# Allegro board PSU-C2-6Layers - Copy.brd
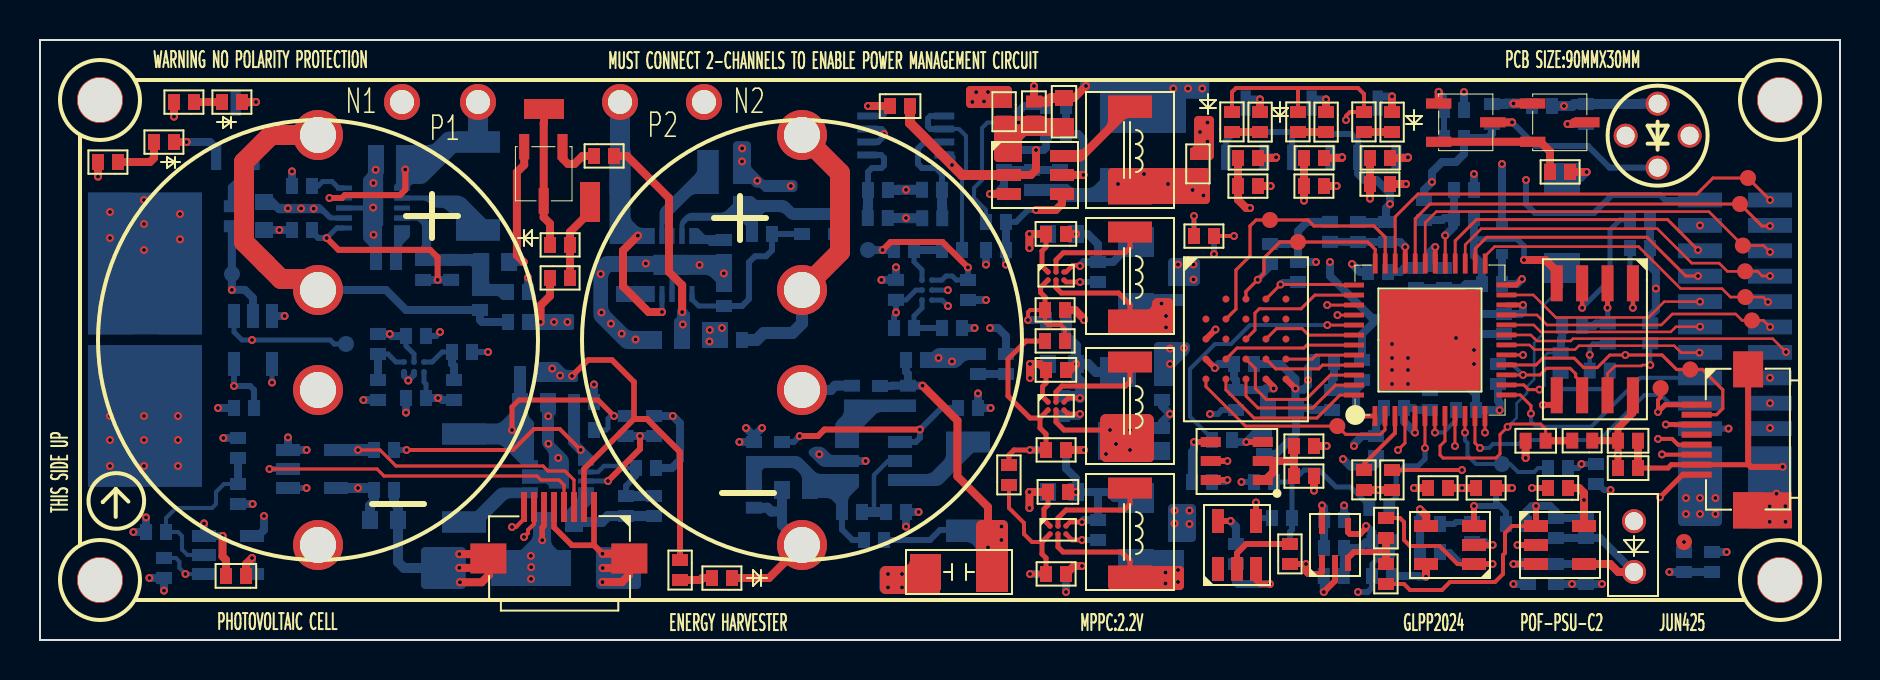
[diagram p0: board, top side]
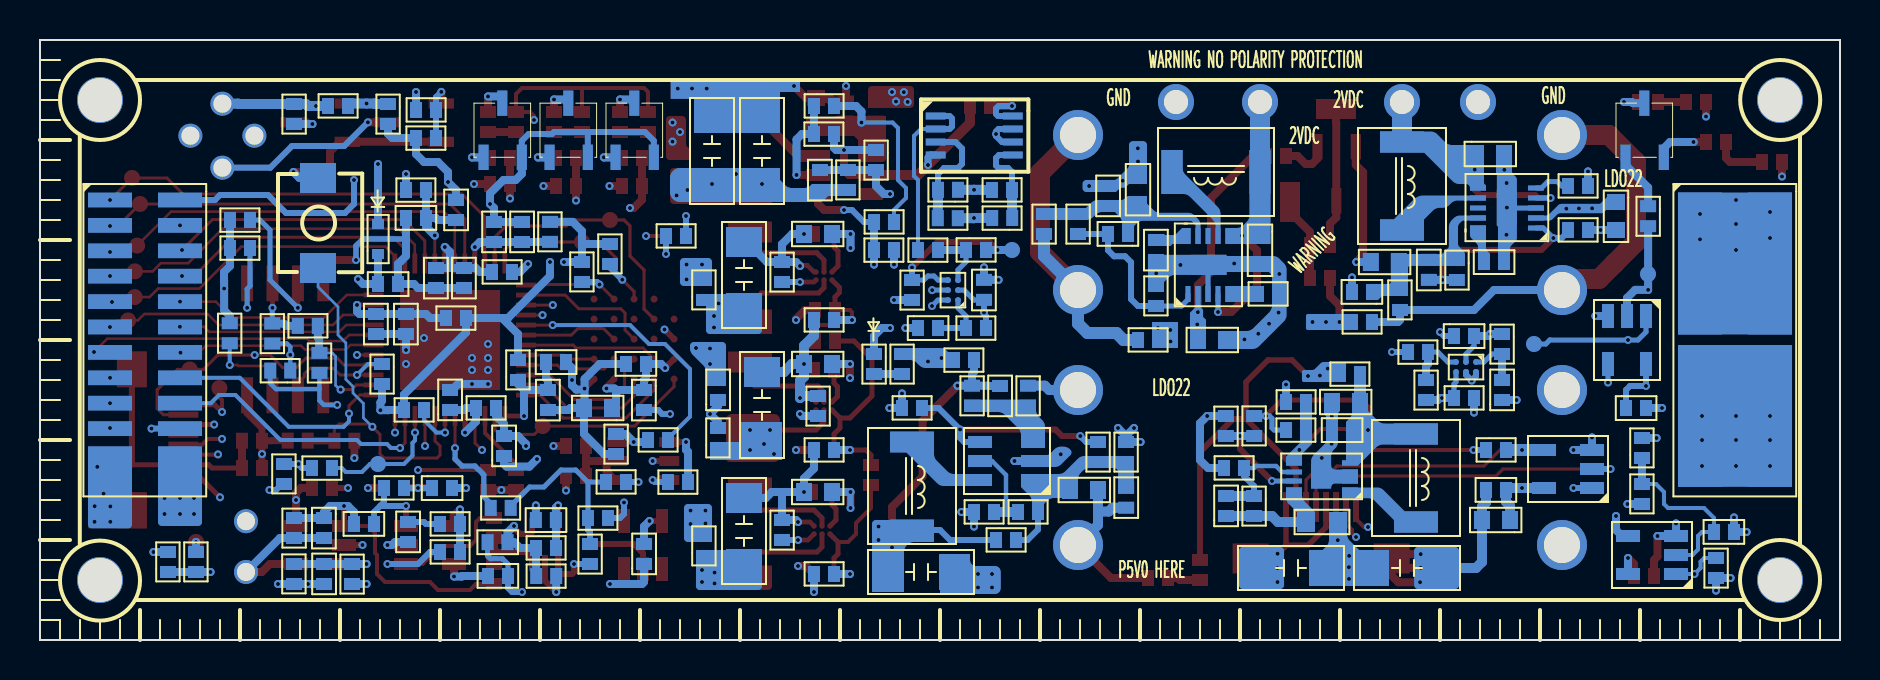
[diagram p1: board, bottom side, seen from below]

Outline 90 x 30 mm; copper layers: TOP, GND, SIG1, VCC, GND2, BOTTOM. Coordinates in mm from the lower left corner of the outline.
Outline path: 0,30 90,30 90,0 0,0 0,30

## Design rules (mm)
constraint set DEFAULT: min track width 0.127
net group N478267: nets N478267 N478271
net group N485107: nets N485107 N485115
net group N813852: nets N813852 N814000
net group N1495908: nets N1495908 N1495915
net group N1504028: nets N1504028 N1504040
net group N1511461: nets N1511461 N1511469
net group P1V8: nets N1128601 P1V8
net group SIG_ALIVE: nets N1346126 SIG_ALIVE
net group VCAP: nets N821854 N822032
net group VCAP1: nets N478345 VCAP1
net group VCAP2: nets N485373 VCAP2
net group 1ST_EN: nets 1ST_EN IO_P5V0_SHDN IO_P5V0_SHDN_EXT N813698 N813706 N813884 N813992
net group CHG_FULL: nets CHG_FULL N821870 N822044 N823149 N823315 N824564 N824724 N1633088 UV_SHDN
net group DPU_UART_TX: nets DPU_UART_TX N1120309 N1120313 N1120345 P2V9ADJ PSU_UART_TX
net group IAM_ALIVE_EXT: nets IAM_ALIVE IAM_ALIVE_EXT N1161020
net group MG1: nets RAM_ADQ7
net group N1493508: nets N1493508 N1504216 N1511693
net group N1528431: nets N1528431 N1528623 N1528651
net group P1V2: nets P1V2
net group P1V8ADJ_PRE: nets N1528387 N1528491 P1V8ADJ_PRE
net group P5033_PRE: nets N1521862 N1521910 N1521958 N1522062 N1522150 P5033_PRE

## Placement (name value [footprint] x y rotation side)
C1  0.1uF  [C0402_SMT]  42.5 26.7 0 top
C2  0.1uF  [C0402_SMT]  49.7 26.93 270 top
C3  10uF  [C0603_SMT]  51.2 25.7 90 top
C4  0.1uF  [C0402_SMT]  51.3 20.3 180 top
C5  CEN5R5205HF-ZG  [SUC_C_5D0_21D5_H_20D5]  13.9 15 270 top
C6  CEN5R5205HF-ZG  [SUC_C_5D0_21D5_H_20D5]  38.1 15 270 top
C7  0.1uF  [C0402_SMT]  51.3 13.5 180 top
C8  0.47uF  [C0402_SMT]  74.28 9.96 0 top
C9  10nF  [C0402_SMT]  78.9 9.96 0 top
C10  0.1uF  [C0402_SMT]  78.9 8.6 0 top
C11  0.1uF  [C0402_SMT]  76.4 7.6 180 top
C12  0.1uF  [C0402_SMT]  51.4 7.4 180 top
C13  0.1uF  [C0402_SMT]  67.3 6.1 270 top
C14  47uF  [C1206]  47.6 3.4 180 top
C15  0.1uF  [C0402_SMT]  10.3 3.2 180 top
C16  47uF  [C1206]  56.4 22.8 90 bottom
C17  47uF  [C1206]  53.9 22.8 90 bottom
C18  10uF  [C0603_SMT]  18.2 24.3 180 bottom
C19  22pF  [C0402_SMT]  51 23.5 270 bottom
C20  10uF  [C0603_SMT]  35.1 21.8 90 bottom
C21  0.1uF  [C0402_SMT]  36.6 21.7 90 bottom
C22  0.1uF  [C0402_SMT]  69.2 21 90 bottom
C23  10uF  [C0603_SMT]  11.2 21.9 270 bottom
C24  10nF  [C0402_SMT]  70.7 21.1 0 bottom
C25  0.1uF  [C0402_SMT]  67.3 19.9 90 bottom
C26  10nF  [C0402_SMT]  65.9 19.9 90 bottom
C27  10uF  [C0603_SMT]  50.4 20.3 0 bottom
C28  22pF  [C0402_SMT]  35.6 20.3 0 bottom
C29  1uF  [C0402_SMT]  34.2 20 270 bottom
C30  10uF  [C0603_SMT]  29 20.2 270 bottom
C31  10uF  [C0603_SMT]  22.05 18.9 0 bottom
C32  1uF  [C0402_SMT]  17.8 18.9 180 bottom
C33  22pF  [C0402_SMT]  20.55 19.01 270 bottom
C34  22uF  [C1206]  54.8 16.6 90 bottom
C35  0.1uF  [C0402_SMT]  70.2 18.6 270 bottom
C36  10nF  [C0402_SMT]  68.8 18.6 270 bottom
C37  0.1uF  [C0402_SMT]  73.1 17.8 180 bottom
C38  0.1uF  [C0402_SMT]  42.8 18.01 270 bottom
C39  0.1uF  [C0402_SMT]  23.4 17.4 0 bottom
C40  10nF  [C0402_SMT]  73.2 16.3 270 bottom
C41  0.1uF  [C0402_SMT]  71.7 16.3 270 bottom
C42  2.2uF  [C0402_SMT]  46.1 15.6 180 bottom
C43  0.1uF  [C0402_SMT]  19.3 15.2 180 bottom
C44  10uF  [C0603_SMT]  32.1 15 180 bottom
C45  10nF  [C0402_SMT]  64.7 13.9 180 bottom
C46  0.1uF  [C0402_SMT]  59.7 13.8 0 bottom
C47  10uF  [C0603_SMT]  50.4 13.8 0 bottom
C48  2.2uF  [C0402_SMT]  16.9 12 90 bottom
C49  22pF  [C0402_SMT]  42 11.7 90 bottom
C50  0.1uF  [C0402_SMT]  69.5 11.5 90 bottom
C51  0.1uF  [C0402_SMT]  64.6 12.5 270 bottom
C52  10uF  [C0603_SMT]  24 11.9 0 bottom
C53  22uF  [C1206]  53.9 10.1 90 bottom
C54  10uF  [C0603_SMT]  61.4 11.6 0 bottom
C55  0.1uF  [C0402_SMT]  10.7 11.6 180 bottom
C56  0.1uF  [C0402_SMT]  25.4 10.5 180 bottom
C57  0.1uF  [C0402_SMT]  70.4 7.6 180 bottom
C58  10uF  [C0603_SMT]  38.5 7.5 180 bottom
C59  0.1uF  [C0402_SMT]  16.7 7.5 0 bottom
C60  10uF  [C0603_SMT]  50.4 7.4 0 bottom
C61  0.1uF  [C0402_SMT]  35.7 6.61 90 bottom
C62  33pF  [C0402_SMT]  30.7 6.2 90 bottom
C63  0.1uF  [C0402_SMT]  65.2 6 180 bottom
C64  10uF  [C0603_SMT]  16.5 6 0 bottom
C65  0.1uF  [C0402_SMT]  73.3 5.8 0 bottom
C66  1.5pF  [C0402_SMT]  75.8 6.1 270 bottom
C67  22uF  [C1206]  54.8 3.8 90 bottom
C68  0.1uF  [C0402_SMT]  71.6 4.9 90 bottom
C69  0.1uF  [C0402_SMT]  5.3 5.4 0 bottom
C70  0.1uF  [C0402_SMT]  67.62 4.89 180 bottom
C71  0.1uF  [C0402_SMT]  59.8 3.8 90 bottom
C72  22uF  [C1206]  25.8 3.6 0 bottom
C73  22uF  [C1206]  23.3 3.6 180 bottom
C74  47uF  [C1206]  47.6 3.4 180 bottom
C75  DNP  [C0402_SMT]  75.8 2.8 90 bottom
C76  0.1uF  [C0402_SMT]  66.6 3.2 0 bottom
D1  GREEN LED  [LED0402_SMT]  10.1 26.9 180 top
D2  GREEN LED  [LED0402_SMT]  59.6 25.4 90 top
D3  GREEN LED  [LED0402_SMT]  62.9 25.4 90 top
D4  GREEN LED  [LED0402_SMT]  66.2 25.4 90 top
D5  GREEN LED  [LED0402_SMT]  6.7 24.9 180 top
D6  GREEN LED  [LED0402_SMT]  34.6 3.1 180 top
D7  1N5819WT  [SOD-523]  73.1 19.3 90 bottom
D8  GREEN LED  [LED0402_SMT]  48.3 14.3 270 bottom
D9  GREEN LED  [LED0402_SMT]  25.5 19.75 0 top
FB1  BLM15PX121SN1D  [L0402_SMT]  64.5 19.91 90 bottom
FB2  BLM15PX121SN1D  [L0402_SMT]  67.4 18.4 180 bottom
FB3  BLM15PX121SN1D  [L0402_SMT]  68.7 16.1 0 bottom
FB4  BLM15PX121SN1D  [L0402_SMT]  66.1 13 90 bottom
FB5  BLM15PX121SN1D  [L0402_SMT]  68.2 11.6 180 bottom
J1  CONN-1X8  [FPC-0D5-8P]  82.83 11.77 270 top
J2  CONN-24P  [SMD_CONN_2X12P_1D27]  83 22 270 bottom
J3  CONN-24P  [SMD_CONN_2X12P_1D27]  3.5 22 270 bottom
J4  CONN-1X8  [FPC-0D5-8P]  27.7 6.65 180 top
L1  47uH/200mA  [IND_SMD_4D4X4D2]  54.5 26.7 270 top
L2  2.2uH/200mA  [IND_SMD_4D4X4D2]  54.5 20.4 270 top
L3  2.2uH/200mA  [IND_SMD_4D4X4D2]  54.5 13.9 270 top
L4  2.2uH/200mA  [IND_SMD_4D4X4D2]  54.5 7.6 270 top
L5  10uH/1A  [IND_SMD_4D4X4D2]  29 23.4 0 bottom
L6  10uH/1A  [IND_SMD_4D4X4D2]  21.9 24.9 270 bottom
L7  2.2uH  [L0402]  56.1 12 90 bottom
L8  2.2uH  [L0402]  59.8 12.5 270 bottom
L9  2.2uH  [L0402]  66.8 9.2 90 bottom
L10  4.7uH/200mA  [IND_SMD_4D4X4D2]  21.2 10.3 270 bottom
L11  47uH/100mA  [IND_SMD_4D4X4D2]  46.4 9.9 270 bottom
L12  0R  [L0603]  26.7 5.9 180 bottom
LD1  LaserDiode  [LD_CIR_THR_4P]  80.88 25.22 90 top
NOREF  -  []  0 0 90 top
NOREF#2  -  [unnamed#2]  3 27 0 top
NOREF#3  -  [unnamed#2]  87 27 0 top
NOREF#4  -  [unnamed#2]  87 3 0 top
NOREF#5  -  []  0 30 0 top
NOREF#6  -  [unnamed#2]  3 3 0 top
PD1  Photodiode  [PD-THR-2P]  79.7 3.4 90 top
Q1  BFR93AWH6327  [SOT23-3]  69.5 27.3 270 top
Q2  BFR93AWH6327  [SOT23-3]  74.2 27.3 270 top
Q3  MMBT2222ALT1G  [SOT-23-3]  68.3 23.7 180 bottom
Q4  MMBT2222ALT1G  [SOT-23-3]  65 23.7 180 bottom
Q5  MMBT2222ALT1G  [SOT-23-3]  61.7 23.7 180 bottom
Q6  MMBT2222ALT1G  [SOT-23-3]  11.2 23.7 180 bottom
Q7  MMBT2222ALT1G  [SOT-23-3]  26.6 25.1 180 top
R1  20K  [R0402_SMT]  7.7 26.9 180 top
R2  0  [R0402_SMT]  48.2 26.92 270 top
R3  20K  [R0402_SMT]  61 26.4 270 top
R4  20K  [R0402_SMT]  64.3 26.4 270 top
R5  20K  [R0402_SMT]  67.6 26.4 270 top
R6  1K  [R0402_SMT]  59.9 24.1 0 top
R7  1K  [R0402_SMT]  63.2 24.1 0 top
R8  1K  [R0402_SMT]  66.5 24.1 0 top
R9  20K  [R0402_SMT]  3.9 23.9 180 top
R10  0  [R0402_SMT]  57.9 23.3 90 top
R11  51  [R0402_SMT]  75.5 23.4 0 top
R12  6.8K  [R0402_SMT]  67.5 22.8 180 top
R13  6.8K  [R0402_SMT]  60.9 22.7 180 top
R14  6.8K  [R0402_SMT]  64.2 22.7 180 top
R15  DNP  [R0402_SMT]  58.7 20.2 180 top
R16  DNI  [R0402_SMT]  32 4 270 top
R17  0  [R0402_SMT]  50.25 16.5 0 top
R18  10K  [R0402_SMT]  77.61 9.97 180 top
R19  DNP  [R0402_SMT]  63.7 9.7 180 top
R20  DNP  [R0402_SMT]  50.3 9.5 0 top
R21  0  [R0402_SMT]  63.7 8.2 180 top
R22  0  [R0402_SMT]  66.2 7.5 90 top
R23  DNP  [R0402_SMT]  67.6 7.5 90 top
R24  DNP  [R0402_SMT]  69.4 7.6 0 top
R25  DNP  [R0402_SMT]  71.8 7.6 0 top
R26  0  [R0402_SMT]  62.5 3.8 90 top
R27  DNP  [R0402_SMT]  50.3 3.3 0 top
R28  DNP  [R0402_SMT]  67.3 2.8 90 top
R29  510  [R0402_SMT]  75.6 26.7 180 bottom
R30  DNI  [R0402_SMT]  51.3 26.7 180 bottom
R31  510  [R0402_SMT]  71.2 26.5 180 bottom
R32  51  [R0402_SMT]  77.3 26.8 270 bottom
R33  510  [R0402_SMT]  72.6 26.8 270 bottom
R34  0  [R0402_SMT]  50.3 25.3 0 bottom
R35  510  [R0402_SMT]  70.2 25.1 0 bottom
R36  39K  [R0402_SMT]  48.2 24.5 270 bottom
R37  150K  [R0402_SMT]  49.6 22.5 90 bottom
R38  200K  [R0402_SMT]  13.6 22.7 180 bottom
R39  1M  [R0402_SMT]  44.1 22.51 0 bottom
R40  1M  [R0402_SMT]  42.4 22.5 180 bottom
R41  100R  [R0402_SMT]  70.7 22.5 0 bottom
R42  1K  [R0402_SMT]  9.6 21.69 270 bottom
R43  1M  [R0402_SMT]  45.11 21.09 180 bottom
R44  2M  [R0402_SMT]  41.39 21.1 0 bottom
R45  10K  [R0402_SMT]  79.5 21 0 bottom
R46  DNI  [R0402_SMT]  48.3 20.9 180 bottom
R47  0  [R0402_SMT]  39.8 21.3 270 bottom
R48  1M  [R0402_SMT]  38.1 21.3 270 bottom
R49  270K  [R0402_SMT]  13.6 20.5 180 bottom
R50  510  [R0402_SMT]  58.7 20.2 180 bottom
R51  10K  [R0402_SMT]  79.5 19.6 0 bottom
R52  5.1K  [R0402_SMT]  43.7 19.5 180 bottom
R53  100K  [R0402_SMT]  47.3 19.5 0 bottom
R54  1K  [R0402_SMT]  45.1 19.5 0 bottom
R55  4.7K  [R0402_SMT]  61.5 18.8 90 bottom
R56  1M  [R0402_SMT]  19.16 19 270 bottom
R57  4.7K  [R0402_SMT]  62.9 17.9 90 bottom
R58  40.2K  [R0402_SMT]  52.9 18.9 270 bottom
R59  0  [R0402_SMT]  56.8 17 90 bottom
R60  20K  [R0402_SMT]  46.4 18 270 bottom
R61  200K  [R0402_SMT]  29.1 17.3 180 bottom
R62  270K  [R0402_SMT]  34.2 16.7 90 bottom
R63  0  [R0402_SMT]  22 16.5 90 bottom
R64  DNP  [R0402_SMT]  51.3 16 180 bottom
R65  0  [R0402_SMT]  24.4 15.9 180 bottom
R66  DNI  [R0402_SMT]  77.11 15.71 180 bottom
R67  3.3K  [R0402_SMT]  42.7 15.6 0 bottom
R68  10K  [R0402_SMT]  80.51 14.84 90 bottom
R69  0  [R0402_SMT]  78.39 15.82 270 bottom
R70  0  [R0402_SMT]  35.1 15 180 bottom
R71  3.3K  [R0402_SMT]  16.9 15.3 270 bottom
R72  160  [R0402_SMT]  20.6 14.4 0 bottom
R73  0  [R0402_SMT]  43.3 14 0 bottom
R74  0  [R0402_SMT]  76.03 14.36 270 bottom
R75  12K  [R0402_SMT]  46.9 14.3 270 bottom
R76  DNI  [R0402_SMT]  77.49 13.47 0 bottom
R77  10K  [R0402_SMT]  72.9 13.8 270 bottom
R78  0  [R0402_SMT]  24 13.3 0 bottom
R79  300  [R0402_SMT]  20.7 13 270 bottom
R80  150K  [R0402_SMT]  43.4 12.71 270 bottom
R81  33.2K  [R0402_SMT]  40.6 12.71 270 bottom
R82  10K  [R0402_SMT]  19.3 12.1 180 bottom
R83  100K  [R0402_SMT]  27.7 11.9 180 bottom
R84  20K  [R0402_SMT]  51.1 12.2 270 bottom
R85  DNP  [R0402_SMT]  46.9 11.6 180 bottom
R86  2.2K  [R0402_SMT]  71.8 11.5 180 bottom
R87  DNI  [R0402_SMT]  29.29 10.2 90 bottom
R88  0  [R0402_SMT]  30.7 11.2 270 bottom
R89  DNI  [R0402_SMT]  26.7 10.5 0 bottom
R90  0  [R0402_SMT]  56.1 9.6 90 bottom
R91  0  [R0402_SMT]  59.6 10 180 bottom
R92  10K  [R0402_SMT]  61.2 10.3 270 bottom
R93  10K  [R0402_SMT]  9.9 9.1 90 bottom
R94  DNP  [R0402_SMT]  51.3 9.5 180 bottom
R95  2K  [R0402_SMT]  17.7 9.5 180 bottom
R96  0  [R0402_SMT]  37.1 9.9 270 bottom
R97  0  [R0402_SMT]  35.7 9.9 270 bottom
R98  309K  [R0402_SMT]  30.8 8.6 180 bottom
R99  0  [R0402_SMT]  75.4 8.6 0 bottom
R100  DNP  [R0402_SMT]  77.8 7.8 90 bottom
R101  DNP  [R0402_SMT]  61.7 7.9 180 bottom
R102  1K  [R0402_SMT]  57.6 7.9 0 bottom
R103  100K  [R0402_SMT]  72.8 7.6 180 bottom
R104  6.8K  [R0402_SMT]  9.9 6.8 90 bottom
R105  1M  [R0402_SMT]  29.3 7.2 270 bottom
R106  0  [R0402_SMT]  66.46 6.61 0 bottom
R107  0  [R0402_SMT]  43.3 6.4 180 bottom
R108  DNI  [R0402_SMT]  41.1 6.4 180 bottom
R109  0  [R0402_SMT]  61.6 6.1 0 bottom
R110  10K  [R0402_SMT]  70 5.8 180 bottom
R111  10K  [R0402_SMT]  77.3 6.1 270 bottom
R112  11.8K  [R0402_SMT]  52.9 6 270 bottom
R113  DNP  [R0402_SMT]  42.2 5 180 bottom
R114  0  [R0402_SMT]  56.8 4.2 90 bottom
R115  DNP  [R0402_SMT]  65.2 4.6 180 bottom
R116  10K  [R0402_SMT]  70 4.4 180 bottom
R117  DNP  [R0402_SMT]  62.5 4.8 270 bottom
R118  DNP  [R0402_SMT]  83.6 3.4 90 bottom
R119  0  [R0402_SMT]  82.2 3.4 90 bottom
R120  100K  [R0402_SMT]  6.2 4.1 270 bottom
R121  0  [R0402_SMT]  77.3 2.8 90 bottom
R122  DNP  [R0402_SMT]  51.3 3.3 180 bottom
R123  DNP  [R0402_SMT]  74.4 3.8 270 bottom
R124  DNP  [R0402_SMT]  64.19 3.2 0 bottom
R125  0  [R0402_SMT]  48.45 7.75 90 top
R126  0  [R0402_SMT]  50.25 14.95 0 top
R127  20K  [R0402_SMT]  25.5 18.1 0 top
R128  1K  [R0402_SMT]  27.7 24.2 0 top
SW1  SW KEY-SPST  [SW_SMD_2P_L3D9_W3D0_P4D5]  76.1 18.6 90 bottom
TP1  T POINT R  [TP_SMD_CIR_0D8_NP]  61.5 21 0 top
TP2  T POINT R  [TP_SMD_CIR_0D8_NP]  62.9 19.9 0 top
TP3  T POINT R  [TP_SMD_CIR_0D8_NP]  85.14 19.72 0 top
TP4  T POINT R  [TP_SMD_CIR_0D8_NP]  85.26 18.43 0 top
TP5  T POINT R  [TP_SMD_CIR_0D8_NP]  85.27 17.15 0 top
TP6  T POINT R  [TP_SMD_CIR_0D8_NP]  85.59 15.98 0 top
TP7  T POINT R  [TP_SMD_CIR_0D8_NP]  82.51 13.53 0 top
TP8  T POINT R  [TP_SMD_CIR_0D8_NP]  81.03 12.6 0 top
TP9  T POINT R  [TP_SMD_CIR_0D8_NP]  64.87 10.7 0 top
TP10  T POINT R  [TP_SMD_CIR_0D8_NP]  82.2 4.9 0 top
TP11  Solar Cell V-  [TP_THR_1D8_1D2]  33.2 26.9 180 bottom
TP12  Solar Cell V+  [TP_THR_1D8_1D2]  29 26.9 180 bottom
TP13  Solar Cell V+  [TP_THR_1D8_1D2]  21.9 26.9 180 bottom
TP14  Solar Cell V-  [TP_THR_1D8_1D2]  18.1 26.9 180 bottom
TP15  T POINT R  [TP_SMD_CIR_0D8_NP]  41.4 19.5 180 bottom
TP16  T POINT R  [TP_SMD_CIR_0D8_NP]  15.3 14.8 180 bottom
TP17  T POINT R  [TP_SMD_CIR_0D8_NP]  73.1 8.8 180 bottom
TP18  T POINT R  [TP_SMD_CIR_0D8_NP]  85.4 23.1 0 top
TP19  T POINT R  [TP_SMD_CIR_0D8_NP]  85 21.8 0 top
TP20  T POINT R  [TP_SMD_CIR_0D8_NP]  9.6 18.3 180 bottom
TP21  T POINT R  [TP_SMD_REC_1D0X2D0]  27.5 21.9 0 top
TP22  T POINT R  [TP_SMD_REC_1D0X2D0]  25.2 26.55 90 top
U1  LTC3542ES6  [TSOT-23-6]  51.1 24.2 270 top
U2  MAX38650AANT+  [WLP-6]  50.4 18.4 0 top
U3  APS25608N-OBR-BD  [BGA-24]  58.3 17.05 0 top
U4  iCE40UP5K- SG48  [QFN-48]  69.5 15 90 top
U5  W25Q64JWSSIQ  [SOIC-8]  79.65 17.84 270 top
U6  MAX38650AANT+  [WLP-6]  50.4 11.9 0 top
U7  TPS22995HQDDCRQ1  [SOT-23-6]  61.14 8 180 top
U8  MAX38650AANT+  [WLP-6]  50.5 5.7 0 top
U9  SN74LVC1G14DBVR  [SOT-23-5]  58.9 3.55 90 top
U10  LMV7291MGX/NOPB  [SC70-5]  64.1 5.7 0 top
U11  OPA320AIDBVR  [SOT-23-5]  71.7 3.8 180 top
U12  OPA320AIDBVR  [SOT-23-5]  74.8 5.7 0 top
U13  ADA4051-2ARMZ  [MSOP-8]  41.6 26.2 270 bottom
U14  LTC3105EDD#PBF  [DFN-10]  18.1 20.6 90 bottom
U15  LTC3105EDD#PBF  [DFN-10]  32.6 20.2 180 bottom
U16  ADCMP380-1ACBZ-RL7  [WLCSP-6]  44.1 16.99 0 bottom
U17  SN74LVC1G32DBVR  [SOT-23-5]  9.7 16.2 270 bottom
U18  ADCMP380-1ACBZ-RL7  [WLCSP-6]  18.2 13.9 270 bottom
U19  LTC3542ES6  [TSOT-23-6]  43 8 90 bottom
U20  SN74AUP1G08DBVR  [SOT-23-5]  12.4 7.6 0 bottom
U21  LTC3539EDCB-2#TRPBF  [DFN-8]  27.3 7.5 90 bottom
U22  SN74LVC1G32DBVR  [SOT-23-5]  8.2 3.3 0 bottom

## Library data of the parts
C1 C38 C43 = CAP NP: signal model: DEFAULT_CAPACITOR_100000pF_2_1
C2 C4 C7-C13 C15 C21 C22 C24-C26 C28 C33 C35-C37 C39-C41 C45 C46 C50 C51 C54-C57 C59 C61 C63 C65 C66 C68-C71 C75 C76 = CAP NP
C3 C18 C20 C23 C27 C30 C31 C44 C47 C52 C58 C60 C64 = CAP NP: signal model: DEFAULT_CAPACITOR_1e+07pF_2_1
C5 C6 = SuperCapacitor
C14 C16 C17 C34 C53 C67 C72-C74 = CAP NP: signal model: DEFAULT_CAPACITOR_2.2e+07pF_2_1
C19 C49 C62 = CAP NP: signal model: DEFAULT_CAPACITOR_33.000000pF_2_1
C29 C32 = CAP NP: signal model: DEFAULT_CAPACITOR_1e+06pF_2_1
C42 C48 = CAP NP: signal model: DEFAULT_CAPACITOR_2.2e+06pF_2_1
D1-D6 D8 D9 = LED
D7 = DIODE
FB1-FB5 = INDUCTOR
J1 J4 = CONN-1X8
J2 J3 = CONN-24P
L1-L4 L7-L12 = INDUCTOR: signal model: DEFAULT_INDUCTOR_4700nH_2_1
L5 L6 = INDUCTOR: signal model: DEFAULT_INDUCTOR_10000nH_2_1
LD1 = LaserDiode_0
PD1 = Photodiode
Q1 Q2 = 2SC1815
Q3-Q7 = MMBT2222AL
R1-R10 R12-R14 R16 R18 R19 R21-R26 R28 R41 R45 R47 R51 R55 R57 R59 R63 R65 R66 R68-R70 R73-R78 R86 R90-R92 R97 R101-R103 R106 R109-R111 R114-R117 R121 R123 R124 R127 = R
R11 R32 = R: signal model: DEFAULT_RESISTOR_40.000000OHM_2_1
R15 R29 R31 R33 R35 R50 = R: signal model: DEFAULT_RESISTOR_510.000000OHM_2_1
R17 R20 R27 R30 R34 R42 R46 R53 R58 R60 R64 R82-R85 R87-R89 R93-R96 R99 R100 R104 R107 R108 R112 R113 R118-R120 R122 R125 R126 R128 = R: signal model: DEFAULT_RESISTOR_10000OHM_2_1
R36 R81 R98 = R: signal model: DEFAULT_RESISTOR_562000OHM_2_1
R37 R39 R40 R43 R44 R49 R62 R80 R105 = R: signal model: DEFAULT_RESISTOR_0.001OHM_2_1
R38 R61 = R: signal model: DEFAULT_RESISTOR_200000OHM_2_1
R48 R56 = R: signal model: DEFAULT_RESISTOR_0.00226OHM_2_1
R52 R79 = R: signal model: DEFAULT_RESISTOR_147000OHM_2_1
R54 R72 = R: signal model: DEFAULT_RESISTOR_36000OHM_2_1
R67 R71 = R: signal model: DEFAULT_RESISTOR_3300OHM_2_1
SW1 = SW KEY-SPST
TP1-TP10 TP15-TP22 = T POINT R
TP11-TP14 = T POINT A
U1 U19 = LTC3542ES6
U2 U6 U8 = MAX38650AANT+
U3 = APS25608N-OBR-BD_2
U4 = iCE40UP5K- SG48
U5 = W25Q64JW
U7 = TPS22995H-Q1
U9 = SN74LVC1G14DBVR
U10 = LMV7291MGX/NOPB
U11 U12 = OPA320AIDBVR
U13 = ADA4051-2ARMZ
U14 U15 = LTC3105EDD#PBF
U16 U18 = ADCMP380-1ACBZ-RL7
U17 U22 = SN74LVC1G32DBVR
U20 = SN74AUP1G08
U21 = LTC3539EDCB#PBF

## Footprints (pads in the part's own frame, mm; a bottom-side part is the same pattern mirrored in y, then rotated)
BGA-24
  round 0.35 smd: A2(1,0) A3(2,0) A4(3,0) A5(4,0) B1(0,-1) B2(1,-1) B3(2,-1) B4(3,-1) B5(4,-1) C1(0,-2) C2(1,-2) C3(2,-2) C4(3,-2) C5(4,-2) D1(0,-3) D2(1,-3) D3(2,-3) D4(3,-3) D5(4,-3) E1(0,-4) E2(1,-4) E3(2,-4) E4(3,-4) E5(4,-4)
C0402_SMT
  rect 0.6x0.8 smd: 1(0,0) 2(1,0)
C0603_SMT
  rect 0.8x0.9 smd: 1(0,0) 2(1.4,0)
C1206
  rect 1.5x1.8 smd: 1(0,0) 2(3.3,0)
DFN-8
  rect 0.25x0.8 smd: 1(0,-2.8) 2(0.45,-2.8) 3(0.9,-2.8) 4(1.35,-2.8) 5(1.35,0) 6(0.9,0) 7(0.45,0) 8(0,0)
  rect 1.2x1 smd: 9(0.676,-1.355)
DFN-10
  rect 0.25x0.8 smd: 1(0,-2.9) 2(0.5,-2.9) 3(1,-2.9) 4(1.5,-2.9) 5(2,-2.9) 6(2,0) 7(1.5,0) 8(1,0) 9(0.5,0) 10(0,0)
  rect 1.8x1 smd: 11(1.022,-1.444)
FPC-0D5-8P
  rect 0.3x1.5 smd: 1(0,0) 2(0.5,0) 3(1,0) 4(1.5,0) 5(2,0) 6(2.5,0) 7(3,0) 8(3.5,0)
  rect 1.8x1.5 smd: 9(-1.767,2.573) 10(5.283,2.573)
IND_SMD_4D4X4D2
  rect 1.05x2.2 smd: 1(0,0) 2(4.4,0)
L0402
  rect 0.6x0.8 smd: 1(0,0) 2(1,0)
L0402_SMT
  rect 0.6x0.8 smd: 1(0,0) 2(1,0)
L0603
  rect 0.9x1 smd: 1(0,0) 2(1.6,0)
LD_CIR_THR_4P
  round 1.2 hole 0.9: 1(1.6,0) 2(-1.6,0) 3(0,1.6) 4(0,-1.6)
LED0402_SMT
  rect 0.6x0.8 smd: 1(0,0) 2(1,0)
MSOP-8
  rect 0.35x1 smd: 1(-0.001,-3.615) 2(0.649,-3.615) 3(1.299,-3.615) 4(1.949,-3.615) 5(1.949,0.241) 6(1.299,0.241) 7(0.649,0.241) 8(-0.001,0.241)
PD-THR-2P
  round 1.2 hole 0.9: 1(0,0) 2(2.54,0)
QFN-48
  rect 1x0.24 smd: 1(-3.801,2.748) 2(-3.801,2.248) 3(-3.801,1.748) 4(-3.801,1.248) 5(-3.801,0.748) 6(-3.801,0.248) 7(-3.801,-0.252) 8(-3.801,-0.752) 9(-3.801,-1.252) 10(-3.801,-1.752) 11(-3.801,-2.252) 12(-3.801,-2.752) 25(3.822,-2.764) 26(3.822,-2.264) 27(3.822,-1.764) 28(3.822,-1.264) 29(3.822,-0.764) 30(3.822,-0.264) 31(3.822,0.236) 32(3.822,0.736) 33(3.822,1.236) 34(3.822,1.736) 35(3.822,2.236) 36(3.822,2.736)
  rect 0.24x1 smd: 13(-2.748,-3.826) 14(-2.248,-3.826) 15(-1.748,-3.826) 16(-1.248,-3.826) 17(-0.748,-3.826) 18(-0.248,-3.826) 19(0.252,-3.826) 20(0.752,-3.826) 21(1.252,-3.826) 22(1.752,-3.826) 23(2.252,-3.826) 24(2.752,-3.826) 37(2.746,3.797) 38(2.246,3.797) 39(1.746,3.797) 40(1.246,3.797) 41(0.746,3.797) 42(0.246,3.797) 43(-0.254,3.797) 44(-0.754,3.797) 45(-1.254,3.797) 46(-1.754,3.797) 47(-2.254,3.797) 48(-2.754,3.797)
  rect 5x5 smd: 49(0,0)
R0402_SMT
  rect 0.6x0.8 smd: 1(0,0) 2(1,0)
SC70-5
  rect 0.3x0.8 smd: 1(0,-1.85) 2(0.65,-1.85) 3(1.3,-1.85) 4(1.3,0) 5(0,0)
SMD_CONN_2X12P_1D27
  rect 0.74x2.2 smd: 1(0,-3.5) 2(1.27,-3.5) 3(2.54,-3.5) 4(3.81,-3.5) 5(5.08,-3.5) 6(6.35,-3.5) 7(7.62,-3.5) 8(8.89,-3.5) 9(10.16,-3.5) 10(11.43,-3.5) 11(12.7,-3.5) 12(13.97,-3.5) 13(13.97,0) 14(12.7,0) 15(11.43,0) 16(10.16,0) 17(8.89,0) 18(7.62,0) 19(6.35,0) 20(5.08,0) 21(3.81,0) 22(2.54,0) 23(1.27,0) 24(0,0)
SOD-523
  rect 0.5x0.6 smd: 1(0,0) 2(1.5,0)
SOIC-8
  rect 1.8x0.6 smd: 1(0,0) 2(0,-1.27) 3(0,-2.54) 4(0,-3.81) 5(5.6,-3.81) 6(5.6,-2.54) 7(5.6,-1.27) 8(5.6,0)
SOT23-3
  rect 0.51x1.27 smd: 1(0.476,0.434) 2(2.391,0.434) 3(1.415,3.142)
SOT-23-3
  rect 0.51x1.27 smd: 1(0.476,0.434) 2(2.391,0.434) 3(1.415,3.142)
SOT-23-5
  rect 1.2x0.6 smd: 1(0,0) 2(0,-0.95) 3(0,-1.9) 4(2.4,-1.9) 5(2.4,0)
SOT-23-6
  rect 1x0.5 smd: 1(0,0) 2(0,-0.95) 3(0,-1.9) 4(2.6,-1.9) 5(2.6,-0.95) 6(2.6,0)
SUC_C_5D0_21D5_H_20D5
  round 2.5 hole 1.8: 1(-2.5,0) 2(2.5,0) 3(-10.25,0) 4(10.25,0)
SW_SMD_2P_L3D9_W3D0_P4D5
  rect 1.5x1.8 smd: 1(0,0) 2(4.5,0)
TP_SMD_CIR_0D8_NP
  round 0.8 smd: 1(0,0)
TP_SMD_REC_1D0X2D0
  rect 1x2 smd: 1(0,0)
TP_THR_1D8_1D2
  round 1.8 hole 1.2: 1(0,0)
TSOT-23-6
  rect 0.6x1.2 smd: 1(0,-2.65) 2(0.95,-2.65) 3(1.9,-2.65) 4(1.9,0) 5(0.95,0) 6(0,0)
unnamed#2
  round 2.3 hole 2.2 unplated: (0,0)
WLCSP-6
  round 0.3 smd: A1(0,0) A2(0.5,0) B1(0,-0.5) B2(0.5,-0.5) C1(0,-1) C2(0.5,-1)
WLP-6
  round 0.27 smd: A1(0,0) A2(0.4,0) A3(0.8,0) B1(0,-0.4) B2(0.4,-0.4) B3(0.8,-0.4)

## Nets
GND: C1.2 C2.1 C3.2 C4.1 C5.2 C5.4 C6.2 C6.4 C7.1 C8.1 C9.2 C10.2 C11.2 C12.1 C14.2 C15.2 C16.2 C17.2 C18.2 C20.2 C21.2 C22.2 C23.2 C24.2 C25.2 C26.2 C27.2 C29.2 C30.2 C31.2 C32.2 C34.2 C35.2 C36.2 C37.2 C38.1 C39.2 C40.2 C41.2 C42.1 C43.1 C44.2 C45.2 C46.2 C47.2 C48.1 C50.2 C51.2 C52.2 C53.2 C54.2 C55.2 C56.1 C57.2 C58.2 C59.2 C60.2 C61.1 C63.1 C64.2 C67.2 C68.1 C69.1 C70.1 C71.1 C72.2 C73.2 C74.2 C75.1 C76.1 D5.1(CATHODE) D6.1(CATHODE) D8.1(CATHODE) J1.7 J1.9 J1.10 J2.11 J2.12 J3.7 J3.8 J3.9 J3.10 J3.11 J3.12 J3.13 J3.14 J3.15 J3.16 J3.17 J3.18 J4.1 J4.5 J4.9 J4.10 PD1.2 Q3.2(EMITTER) Q4.2(EMITTER) Q5.2(EMITTER) Q6.2(EMITTER) Q7.2(EMITTER) R11.2 R24.1 R33.2 R34.1 R35.2 R36.1 R38.2 R39.1 R40.1 R49.2 R53.1 R58.1 R61.2 R62.2 R64.1 R81.1 R83.1 R84.1 R85.1 R88.1 R92.2 R94.1 R98.1 R102.1 R104.1 R107.1 R112.1 R120.2 R121.1 R122.1 R124.1 SW1.2 TP11.1(TP) TP14.1(TP) U1.2 U2.A3 U3.C1 U3.E5(VSS#E5) U4.49 U5.4 U6.A3 U7.4 U8.A3 U9.3 U10.2 U11.2(V-) U12.2(V-) U13.4(V-) U14.3 U14.11 U15.3 U15.11 U16.A2 U16.B2 U17.3 U18.A2 U18.B2 U19.2 U20.3 U21.2 U21.3 U21.9 U22.3
P1V2: L9.1 R114.2
P1V8: L7.1 R21.1 R90.2
P1V8_RX: C11.1 C63.2 C71.2 C76.2 R25.2 R115.2 R123.2 U7.5(VOUT) U9.5 U10.5 U11.5 U12.5
P1V8ADJ_PRE: C16.1 C17.1 C19.2 L1.2 R10.1 R37.1
P1V20: FB2.2 FB5.2 L9.2 R41.2
P1V80: C9.1 C10.1 FB1.2 FB3.1 FB4.2 J1.8 L7.2 L8.2 R12.1 R13.1 R14.1 R18.1 R45.2 R51.2 R55.2 R57.2 R68.2 R77.2 R86.1 U5.8
P2V8: D2.2 D3.2 D4.2 D7.2 R59.2
P2V9ADJ: LD1.1 R10.2 R19.1 R29.1 R31.1 R32.1
P5V0: C4.2 C7.2 C12.2 C27.1 C47.1 C60.1 C72.1 C73.1 J3.1 J3.2 J3.3 J3.4 J3.5 J3.6 J3.19 J3.20 J3.21 J3.22 J3.23 J3.24 J4.6 L12.2 R1.2 R2.1 R9.2 R17.2 R20.2 R27.2 R93.2 R97.1 U2.A1 U6.A1 U8.A1
VCCIO_0: C25.1 C26.1 FB1.1 U4.33
VCCIO_2: C45.1 C51.1 FB4.1 U4.1
1ST_EN: J4.3 R95.2 U20.4(Y)
CHG_FULL: R79.2 R82.1 TP16.1(TP) U17.1 U18.C2
DONE2_LED: R86.2 U4.7
DPU_UART_RX: J2.24 R101.2
DPU_UART_TX: J2.23 R15.1
FF2_SCK: J1.3 R77.1 U4.15 U5.6
FF2_SS: J1.2 R51.1 TP7.1(TP) U4.16 U5.1
FL2_MISO: R66.1 R69.1 U5.2
FL2_MOSI: R74.2 R76.2 U5.5
FL2_RST: R68.1 U5.7
FL2_WP: R45.1 U5.3(W\P\(IO2))
FP2_RST: C8.2 J1.6 R18.2 SW1.1 U4.8
FP2_SI: J1.1 R69.2 R76.1 TP8.1(TP) U4.17
FP2_SO: J1.5 R66.2 R74.1 U4.14
IAM_ALIVE: R119.2 TP10.1(TP) U4.9
IAM_ALIVE_EXT: J2.10 R118.2
IO1: J2.18 U4.18
IO2: J2.17 U4.13
IO3: J2.8 U4.12
IO4: J2.16 U4.11
IO5: J2.1 TP18.1(TP) U4.34
IO6: J2.2 TP19.1(TP) U4.32
IO7: J2.7 U4.19
IO_P5V0_SHDN: R99.1 TP17.1(TP) U4.10
IO_P5V0_SHDN_EXT: J2.15 R100.1
LD_PWR_EN: R22.2 U4.3
LD_PWR_EN_EXT: J2.9 R23.2
LDO22-1: C15.1 C23.1 C55.1 C59.1 C64.1 U14.2 U17.5 U20.5 U22.5
LDO22-2: C1.1 C38.2 C43.2 C44.1 R60.2 R67.1 R71.1 R82.2 R128.2 U13.8 U15.2 U16.B1 U18.B1
LED0: J4.8 R8.1 R12.2 U4.39
LED1: J4.7 R7.1 R14.2 U4.40
LED2: R6.1 R13.2 R91.2 U4.41
LOCK_EN: J4.4 U17.4(Y) U20.2
NC.A2: U3.A2
NC.A5: U3.A5
NC.B1: U3.B1
NC.B3: U3.B3
NC.B4: U3.B4
NC.B5: U3.B5
NC.C5: U3.C5
P5033: J2.13 J2.14 R73.2 R75.1
P5033_PRE: C14.1 C49.2 C74.1 L11.2 R73.1 R80.1 R113.1
PSU_UART_RX: R106.2 U4.6
PSU_UART_TX: R50.1 U4.4
RAM_ADQ0: U3.D3 U4.46
RAM_ADQ1: U3.D2 U4.43
RAM_ADQ2: U3.C4 U4.42
RAM_ADQ3: U3.D4 U4.45
RAM_ADQ4: U3.D5 U4.44
RAM_ADQ5: U3.E3 U4.47
RAM_ADQ6: U3.E2 U4.48
RAM_ADQ7: TP9.1(TP) U3.E1 U4.2
RAM_CE: R55.1 TP2.1(TP) U3.A3 U4.36
RAM_CLK: TP1.1(TP) U3.B2 U4.35
RAM_DQS: U3.C3 U4.38
RAM_RST: R57.1 U3.A4 U4.37
RFU: U3.C2
RX_PWR_EN: R91.1 R92.1 U7.3
SIG_ALIVE: R42.2 TP20.1(TP) U17.2 U22.4(Y)
SPI1_MISO: J2.5 TP5.1(TP) U4.25
SPI1_MOSI: J2.3 TP3.1(TP) U4.31
SPI1_NSS: J2.6 TP6.1(TP) U4.21
SPI1_SCK: J2.4 TP4.1(TP) U4.27
SPI2_MISO: J2.20 U4.23
SPI2_MOSI: J2.22 U4.28
SPI2_NSS: J2.19 U4.20
SPI2_SCK: J2.21 U4.26
SPI_VCCIO1: C40.1 C41.1 FB3.2 U4.22
UV_SHDN: R52.2 R60.1 TP15.1(TP) U16.C2 U20.1
VCAP: J4.2 R16.1 R43.2 R44.2 R65.1 R70.2 R78.2 R127.1
VCAP1: C31.1 C33.1 C39.1 R56.1 R63.2 U14.9(VOUT)
VCAP2: C20.1 C21.1 C28.1 R47.1 R48.1 U15.9(VOUT)
N478267: C18.1 L6.1 TP13.1(TP) U14.4 U14.6
N478271: L6.2 U14.7
N478345: C33.2 R49.1 R56.2 U14.1
N478369: R38.1 U14.5
N478385: C32.1 U14.10
N479121: C5.1 C5.3 R63.1 R65.2
N485107: C30.1 L5.1 TP12.1(TP) U15.4 U15.6
N485115: L5.2 U15.7
N485373: C28.2 R48.2 R62.1 U15.1
N485445: R61.1 U15.5
N485483: C29.1 U15.10
N486717: C6.1 C6.3 R47.2 R70.1
N813698: C52.1 C56.2 L10.1 R78.1 R87.2 R89.2 U21.4
N813706: L10.2 U21.1
N813852: C62.1 L12.1 R105.2 U21.8(VOUT)
N813884: R87.1 R88.2 U21.7
N813992: R83.2 R89.1 R95.1 R99.2 R100.2 U21.5
N814000: C62.2 R98.2 R105.1 U21.6
N821854: R39.2 R43.1 U13.3
N821870: R54.2 U13.1 U13.2
N822032: R40.2 R44.1 U13.5
N822044: R72.2 U13.6 U13.7
N823149: C42.2 R67.2 U16.A1(VCC)
N823315: R52.1 R54.1 U16.C1
N824564: C48.2 R71.2 U18.A1(VCC)
N824724: R72.1 R79.1 U18.C1
N834143: D6.2 R16.2
N943794: C65.2 C66.1 R28.1 R111.1 U12.1
N943802: C66.2 PD1.1 R111.2 U12.4
N950397: C57.1 R24.2 R25.1 R103.2
N953867: C13.1 R116.1 U11.1
N953891: R110.2 R116.2 U11.4
N953940: C68.2 R110.1
N957540: C13.2 R28.2 U10.3
N961187: C70.2 R115.1 R124.2 U10.4
N963384: R26.1 R117.2 U10.1(VOUT)
N964994: R109.1 U9.4(Y)
N965959: R101.1 R106.1 R109.2 R117.1
N1037075: D5.2 R9.1
N1120293: LD1.2 Q1.3
N1120309: Q2.1 R15.2 R29.2 R33.1 R50.2
N1120313: Q2.3 R32.2
N1120345: Q1.1 R31.2 R35.1
N1120473: Q1.2(E) Q2.2(E) R11.1
N1125946: C50.1 FB5.1 U4.5
N1126010: C35.1 C36.1 FB2.1 U4.30
N1126482: C22.1 C24.1 R41.1 U4.29
N1126654: C37.1 D7.1(K) U4.24(VPP_2V5)
N1128601: C46.1 C54.1 L8.1 U3.D1 U3.E4
N1140972: C69.2 R93.1 R104.2 U22.2
N1147788: D2.1(CATHODE) R3.2
N1147792: D3.1(CATHODE) R4.2
N1147796: D4.1(CATHODE) R5.2
N1147848: Q5.3 R3.1
N1147852: Q4.3 R4.1
N1147856: Q3.3 R5.1
N1147930: Q5.1 R6.2
N1147938: Q4.1 R7.2
N1147946: Q3.1 R8.2
N1161020: R118.1 R119.1 R120.1 U22.1
N1296793: C75.2 R121.2 R123.1 U12.3
N1325635: C65.1 R103.1 U11.3
N1339760: R26.2 U9.2
N1346126: Q6.1 R42.1
N1347937: D1.1(CATHODE) Q6.3
N1347941: D1.2 R1.1
N1493508: R17.1 R64.2 R126.2 U2.B1
N1495908: L2.1 U2.A2
N1495915: C34.1 L2.2 R59.1 U2.B2
N1496954: R58.2 U2.B3(RSEL)
N1504028: L3.1 U6.A2
N1504040: C53.1 L3.2 R90.1 U6.B2
N1504216: R20.1 R94.2 R125.2 R126.1 U6.B1
N1504224: R84.2 U6.B3(RSEL)
N1511461: L4.1 U8.A2
N1511469: C67.1 L4.2 R114.1 U8.B2
N1511693: R27.1 R122.2 R125.1 U8.B1
N1511701: R112.2 U8.B3(RSEL)
N1521862: L11.1 U19.6
N1521910: C58.1 C61.2 R96.2 R97.2 R108.2 R113.2 U19.1(VIN)
N1521958: C49.1 R80.2 R81.2 U19.3
N1522062: R85.2 R96.1 U19.4
N1522150: R107.2 R108.1 U19.5
N1524626: D8.2 R75.2
N1528387: L1.1 U1.6
N1528431: C2.2 C3.1 R2.2 R30.2 R46.2 U1.1(VIN)
N1528491: C19.1 R36.2 R37.2 U1.3
N1528623: R22.1 R23.1 R46.1 R53.2 U1.4
N1528651: R30.1 R34.2 U1.5
N1559286: R19.2 R21.2 U7.1 U7.2
N1560195: R102.2 U7.6
N1632215: D9.2 R127.2 TP21.1(TP)
N1632252: D9.1(CATHODE) Q7.3 TP22.1(TP)
N1633088: Q7.1 R128.1

Pads without a net: J1 4; LD1 3 4; U9 1; U14 8; U15 8

## Via types
v1: diameter 0.4, hole 0.2, TOP to BOTTOM, 376 vias

## Routing (per net, layer and track width the routed paths; a pad name or vN(x,y) marks a point on that pad's centre or on a via; arc(x,y) is an arc through that point)
GND: length 265
  TOP w0.23: v1(52,18.7) 51.96,18.74 51.64,18.74 51.3,18.4 U2.A3 ; U8.A3 51.5,5.9 v1(52.1,5.9) ; U6.A3 51.4,12.1 v1(52,12.1)
  TOP w0.25: 85.41,8.8 85.37,8.77 J1.7 81.57,8.77 81.4,8.6 C10.2
  TOP w0.28: J4.5 25.7,5.63 26.6,4.74 27.7,4.74 J4.1
  TOP w0.3: v1(61.5,2.8) 61.01,2.8 60.8,3.01 U9.3 ; v1(64.19,2.4) 64.75,2.96 U10.2 ; C11.2 v1(74.6,7.6) ; v1(72.63,4.75) U11.2 ; U7.4 v1(57.7,9.9) ; U3.E5 v1(62.77,12.57) ; v1(87.13,8.66) 85.55,8.66 85.41,8.8 J1.9 ; U3.C1 v1(58.78,15.52) ; 27.7,4.74 v1(28.12,4.31) ; U12.2 v1(73.87,4.75)
  TOP w0.4: 29.45,3.6 29.45,3.25 29.1,2.9 v1(28.12,2.9) ; 29.45,3.6 v1(28.13,3.6) ; 29.45,3.6 29.45,4.06 J4.9 29.23,4.31 v1(28.12,4.31) ; U1.2 49.55,23.25 49.8,23.5 v1(49.8,24.5) ; 22.45,3.61 v1(20.97,3.61) ; 22.45,3.61 22.45,4.05 J4.10 22.2,4.29 v1(20.97,4.29) ; 22.45,3.61 22.45,3.25 22.09,2.89 v1(21,2.89) ; v1(51.8,13.8) 51.5,13.5 C7.1 ; R11.2 v1(77.33,23.4) ; C15.2 9.3,4 9.13,4.17 v1(9.13,5.2) ; D5.1 v1(7.33,24.9) ; R24.1 v1(68.7,7.6) ; C10.2 C9.2 ; C2.1 v1(49.7,27.7) ; C6.4 36.45,3.1 D6.1 ; v1(52.3,27.7) 51.7,27.1 C3.2 ; 24.21,24.67 24.21,23.75 23.84,23.39 23.84,19.24 v1(24.18,18.9) ; C12.1 v1(51.8,7.4) ; C8.1 v1(74.28,9.1) ; v1(74.2,19) 75.27,19 75.84,18.44 U5.4 ; C4.1 v1(51.8,20.3)
  TOP w0.5: C2.1 50.38,26.93 50.56,27.1 C3.2 ; U1.2 46.1,23.25 v1(45.6,23.75) 43.5,25.85 C1.2
  GND w0.4: PD1.2 77.56,5.94 76.39,4.77 ; v1(78.1,2.8) 78.1,3.7 77.05,4.75 76.41,4.75 ; 66.55,3.95 66.55,3.05 v1(65.9,2.4) v1(64.19,2.4) 61.9,2.4 v1(61.5,2.8) ; 66.55,3.95 67.35,4.75 v1(72.63,4.75) v1(73.87,4.75) 76.37,4.75 76.39,4.77 ; 66.55,3.95 65.2,5.3 v1(65.2,6.73) ; v1(76.6,2.8) 76.6,4.56 76.41,4.75 ; 76.39,4.77 76.41,4.75
  GND2 w0.4: 76.6,4.75 v1(73.87,4.75) v1(72.63,4.75) 67.2,4.75 66.45,4 ; 76.6,4.75 77.6,4.75 78.1,4.25 v1(78.1,2.8) ; 76.6,4.75 v1(76.6,2.8) ; 76.6,4.75 77.8,5.95 78.76,5.95 78.77,5.94 PD1.2 ; 66.45,4 66.45,2.95 v1(65.9,2.4) v1(64.19,2.4) 61.9,2.4 v1(61.5,2.8) ; 66.45,4 65.2,5.25 v1(65.2,6.73)
  BOTTOM w0.25: U16.B2 v1(45.39,17.49) ; U16.A2 45.11,16.99 v1(45.4,16.7) ; C70.1 67.62,4.89 67.62,4.21 67.48,4.06 66.87,4.06 66.6,3.79 C76.1
  BOTTOM w0.28: 71.7,20.05 73.85,20.05 74.2,19.7 v1(74.2,19)
  BOTTOM w0.3: 62.6,25.4 64.3,25.4 64.4,25.3 65.57,25.3 65.91,24.96 Q3.2 ; 62.6,25.4 59.75,25.4 59.31,24.96 59.31,24.13 ; 62.6,25.4 62.61,25.39 Q4.2 ; U18.A2 18.2,13.2 18.4,13 18.4,12.99 v1(18.41,12.97) 18.7,13.26 U18.B2 ; C76.1 66.6,2.61 66.39,2.4 v1(65.9,2.4) ; v1(20,15.4) 19.8,15.2 C43.1
  BOTTOM w0.35: U13.4 45.47,24.25 45.6,24.12 v1(45.6,23.75)
  BOTTOM w0.4: R83.1 v1(27.7,12.78) ; v1(43.93,6.4) R107.1 v1(43.3,5.67) ; C48.1 v1(16.17,12) ; R33.2 72.6,25.31 72.39,25.1 R35.2 71.2,24.3 70.8,23.9 70.1,23.9 69.6,23.4 v1(69.6,22.9) 69.2,22.5 C22.2 ; C24.2 71.7,19.2 72.1,18.8 C37.2 71.3,17.8 71.1,17.6 C35.2 C36.2 ; v1(42.07,18.01) C38.1 v1(42.8,18.63) ; C63.1 v1(65.2,6.73) ; D8.1 48.3,15.2 47.9,15.6 v1(47.5,15.6) ; C42.1 v1(46.73,15.6) ; R49.2 v1(11.97,20.5) C23.2 ; C51.2 63.58,11.5 63.48,11.6 C54.2 ; v1(7.33,24.9) 8.5,24.9 8.81,24.59 Q6.2 ; R58.1 53.65,18.9 54.65,19.9 C34.2 ; R58.1 52.9,19.79 52.39,20.3 v1(51.8,20.3) ; R58.1 52.2,18.9 v1(52,18.7) ; v1(4.67,5.4) C69.1 v1(5.3,6.13) ; v1(9.13,5.2) U22.3 v1(8.2,5.83) ; 52.85,7.4 53.41,7.4 53.71,7.1 C67.2 ; 52.85,7.4 v1(51.8,7.4) 51.8,8.08 51.3,8.58 R94.1 ; 52.85,7.4 52.9,7.35 R112.1 52.2,6 v1(52.1,5.9) ; v1(72.63,4.75) 72.4,4.75 72.25,4.9 C68.1 ; C31.2 v1(24.18,18.9) ; R124.1 v1(64.19,2.4) ; v1(6.2,2.47) R120.2 v1(5.47,3.1) ; v1(62.77,12.57) 62.77,11.63 C54.2 ; v1(62.77,12.57) 62.82,12.52 63.18,12.52 63.4,12.74 v1(63.4,13) 63.4,13.6 C45.2 ; v1(62.77,12.57) 62.77,13.05 62.02,13.8 C46.2 ; C50.2 69.4,12.5 69.1,12.8 v1(68.4,12.8) v1(67.6,12.8) ; R122.1 v1(51.3,2.4) ; R38.2 v1(12.6,23.43) ; v1(78.1,2.8) R121.1 v1(76.6,2.8) C75.1 ; Q3.2 65.91,23.31 66.22,23 66.83,23 67.5,22.33 v1(67.5,21.8) 67.3,21.6 C25.2 C26.2 ; v1(61.5,2.8) 59.9,2.8 59.8,2.9 C71.1 ; R53.1 v1(47.3,18.77) ; R92.2 61.8,9.3 62.8,10.3 C54.2 ; v1(77.33,23.4) 77.03,23.1 SW1.2 ; U17.3 v1(12.23,16.2) ; R98.1 31.6,8.6 32,9 32,10.84 v1(31.64,11.2) R88.1 ; R104.1 v1(10.63,6.8) ; v1(46.9,12.33) R85.1 v1(47.53,11.6) ; R34.1 50.3,24.61 50.19,24.5 v1(49.8,24.5) R36.1 ; U19.2 v1(41.28,8.95) ; C55.2 v1(8.9,11.6) ; v1(57.7,9.9) 57.7,9.51 57.6,9.41 R102.1 ; C39.2 v1(24.4,18.13) ; v1(71.7,14.5) C41.2 C40.2 ; R24.1 v1(68.7,7.6) ; v1(12.4,10.13) U20.3 v1(13.33,9.5)
  BOTTOM w0.5: v1(51.8,13.8) 51.8,14.44 51.8,14.44 51.8,14.72 51.3,15.22 R64.1 ; v1(51.8,13.8) 51.8,13.16 52,12.96 v1(52,12.1) 51.9,12.2 R84.1 ; v1(51.8,13.8) 52.4,13.8 52.8,13.4 C53.2 ; C73.2 18.2,3.6 17.9,3.9 C64.2 17.9,6.67 17.7,6.87 C59.2 ; C6.2 39.54,12.5 39.76,12.71 R81.1 ; 37.1,6.43 C58.2 ; 37.1,6.43 36.56,6.43 36.37,6.61 C61.1 ; 37.1,6.43 37.1,5.75 C6.4 ; R40.1 42.89,22.5 42.9,22.51 v1(43.3,22.51) R39.1
  vias: v1(3.5,11.2) v1(3.5,10) v1(3.5,8.7) v1(5.2,11.2) v1(5.2,10) v1(5.2,8.7) v1(6.9,11.2) v1(6.9,10) v1(6.9,8.7) v1(16.67,22.85) v1(16.66,21.62) v1(16.68,20.26) v1(16.78,23.51) v1(25.41,11.19) v1(25.42,9.81) v1(25.91,9.1) v1(28.03,18.3) v1(28.07,16.37) v1(28.55,15.81) v1(29.09,15.31) v1(29.78,15.03) v1(30.29,18.82) v1(32.98,18.75) v1(34.19,18.33) v1(35.11,24.58) v1(35.1,23.93) v1(35.86,22.96) v1(37.54,22.7) v1(38.96,9.29) v1(42.4,3.3) v1(42.4,2.63) v1(43.1,3.3) v1(43.1,2.63) v1(56.66,27.57) v1(57.4,27.57) v1(58.11,27.57) v1(67.6,14.8) v1(67.6,14.1) v1(67.6,13.5) v1(68.4,14.1) v1(68.4,13.5) v1(70.8,15.1) v1(71.7,13.8) v1(86.48,6.68) v1(86.48,5.91) v1(86.82,7.31) v1(87.27,6.69) v1(87.27,5.91)
P1V2: length 16.2
  VCC w0.4: v1(57.47,5.8) v1(57.47,6.47) 57.47,7.1 ; 57.47,7.1 57.47,8.37 58.8,9.7 58.8,10.1 59.6,10.9 61.4,10.9 63.3,9 64.58,9 64.62,9.05 v1(65.15,9.05) ; 57.47,7.1 57.35,7.1 v1(56.73,6.47) v1(56.73,5.83)
  BOTTOM w0.4: v1(65.15,9.05) 65.53,8.67 66.67,8.67 66.8,8.8 L9.1
P1V8: length 14.3
  TOP w0.4: v1(63.7,7.47) R21.1
  SIG1 w0.4: v1(63.7,7.47) 63.17,7.47 62.65,6.95 62.65,6.25 62.25,5.85 60.75,5.85 59.49,7.11 58.4,7.11 56.5,9 v1(56.5,11.3)
  BOTTOM w0.4: L7.1 56.1,11.7 v1(56.5,11.3) 56.1,10.9 R90.2
P1V8_RX: length 32.3
  TOP w0.3: U7.5 v1(59.37,8.95) ; v1(59.53,5.95) U9.5 ; v1(64.1,6.73) U10.5
  TOP w0.4: R25.2 v1(73.6,7.6) ; C11.1 76.96,7.6 77.2,7.36 v1(77.2,7) U12.5 ; U11.5 v1(69.3,3.17)
  SIG1 w0.4: v1(69.3,3.17) 69.67,2.8 v1(73.67,2.8)
  VCC w0.2: 70.3,7.5 70.8,7 71.2,7 71.8,7.6
  VCC w0.3: 70,9.1 71.2,9.1 71.35,9.25 71.7,8.9 72.2,8.9 72.34,9.04
  VCC w0.4: v1(73.6,7.6) 73.6,8.1 73.8,8.3 ; 73.8,8.3 73.3,8.3 72.5,9.1 ; 73.8,8.3 75.9,8.3 v1(77.2,7) ; 61.8,6.6 61.15,5.95 v1(59.53,5.95) ; v1(59.37,8.95) 60.55,8.95 ; v1(69.3,3.17) 69.3,4
  BOTTOM w0.4: v1(69.3,3.17) 68.91,3.17 68.88,3.2 C76.2 ; R115.2 64.2,5.4 64.2,5.41 C63.2 64.2,6.62 v1(64.1,6.73) ; R123.2 v1(73.67,2.8) ; v1(59.53,5.95) 59.8,5.68 C71.2
P1V8ADJ_PRE:
  vias: v1(53.9,22.8) v1(55.2,23.3) v1(56.4,22.8) v1(57.63,22.5) v1(58.17,22.23)
P1V20: length 23.4
  VCC w0.4: v1(71.7,23.3) 69.3,20.9 67.7,20.9 66.69,19.89 66.69,18.8 ; 66.69,18.8 66.69,15.69 66,15 66,12.89 66.69,12.2 66.69,10.69 v1(65.7,9.7) ; 66.69,18.8 v1(65.6,18.8)
  BOTTOM w0.4: v1(65.6,18.8) 66,18.4 FB2.2 ; v1(65.7,9.7) 65.7,9.8 66.1,10.2 L9.2 66.8,10.8 67.2,11.2 FB5.2 ; R41.2 v1(71.7,23.3)
P1V80: length 101.2
  TOP w0.25: v1(81,7.14) 82.13,8.27 J1.8
  TOP w0.35: C9.1 78.41,9.96 78.4,9.97 R18.1 ; C9.1 v1(78.9,9.3) C10.1 ; C9.1 78.9,10.6 79.65,11.35 U5.8
  TOP w0.4: v1(61.53,22.7) R13.1 ; R12.1 v1(68.3,22.8) ; R14.1 v1(64.83,22.7)
  SIG1 w0.4: v1(64.5,18.9) v1(63.8,18.9)
  VCC w0.127: 57.17,14.57 v1(57.2,14.6)
  VCC w0.4: v1(61.53,22.7) 62.03,23.2 63.7,23.2 R14.1 v1(64.83,22.7) ; v1(56.5,13.8) 56.87,13.43 57.17,13.43 58.5,12.1 v1(58.5,11.3) ; v1(56.5,13.8) 56.92,14.22 56.92,14.25 57.03,14.35 57.03,14.43 57.17,14.57 v1(56.5,14.57) v1(56.5,13.8) ; 81,7.9 79.8,7.9 78.9,8.8 v1(78.9,9.3) ; 81,7.9 v1(81,7.14) ; 81,7.9 81.6,8.5 82.3,8.5 82.8,9 82.8,11.2 81.9,12.1 81.9,17.1 81.42,17.57 v1(80.8,17.57) 80.8,19.11 79.7,20.2 73.8,20.2 72.98,19.38 v1(72.98,11.49) ; v1(64.83,22.7) 65.35,22.7 65.95,23.3 67.8,23.3 v1(68.3,22.8) ; v1(64.83,22.7) 64.5,22.37 v1(64.5,18.9) v1(63.8,18.9) 63.8,18 62.7,16.9 62.7,15.5 61.8,14.6 v1(57.2,14.6)
  BOTTOM w0.3: L8.2 59.09,11.5 58.89,11.3 v1(58.5,11.3)
  BOTTOM w0.4: 66.9,16.1 66.6,16.1 64.5,18.2 v1(64.5,18.9) ; 66.9,16.1 FB3.1 68.7,15.37 71.8,12.27 R86.1 72.58,11.5 72.59,11.49 v1(72.98,11.49) 72.98,11.88 72.9,11.96 R77.2 ; 66.9,16.1 66.1,15.3 FB4.2 ; 62.9,19.8 R55.2 ; 62.9,19.8 R57.2 v1(63.8,18.9) ; 62.9,19.8 62.9,20.45 63.36,20.91 FB1.2 ; R68.2 80.51,16.21 80.8,16.49 v1(80.8,17.57) 80.8,17.97 80.8,17.97 80.8,18.4 80.5,18.7 R51.2 R45.2
P2V8: length 37.2
  TOP w0.2: 62.9,27.6 65.9,27.6 66.2,27.3 D4.2 65.5,26.4 65.3,26.2 v1(65.3,26) ; 62.9,27.6 59.8,27.6 59.6,27.4 D2.2 ; 62.9,27.6 D3.2
  VCC w0.4: v1(57.67,18.77) 57.67,19.16 57.7,19.19 57.7,19.9 59.4,21.6 59.4,24 60.4,25 65.3,25 ; v1(57.67,18.77) v1(56.9,18.77) ; v1(57.67,18.77) v1(57.67,18.03) ; 65.3,25 v1(65.3,26) ; 65.3,25 69.2,25 69.9,24.3 72.6,24.3 v1(73.1,23.8)
  BOTTOM w0.4: D7.2 v1(73.1,23.8)
P2V9ADJ: length 66.2
  TOP w0.4: R19.1 v1(64.33,9.7)
  SIG1 w0.4: v1(58,25.4) 57.35,24.75 51.66,24.75 50.9,23.98 50.9,22.56 51.86,21.6 52.61,21.6 57.55,16.66 57.55,15.52 58.42,14.65 59.4,14.65 60.2,13.85 60.2,12.4 61.15,11.45 62.58,11.45 v1(64.33,9.7) ; v1(58,25.4) 58,25.5 v1(58.37,25.87) ; v1(58,25.4) 58,25.29 v1(58.37,24.92)
  VCC w0.4: LD1.1 80.23,27.47 76.97,27.47 v1(76.2,26.7) 75.1,27.8 71.6,27.8 v1(71.2,27.4) 71.2,26.87 70.53,26.2 66.7,26.2 65.1,27.8 59.77,27.8 58.37,26.4 v1(58.37,25.87) ; v1(58.37,25.87) 58.37,25.77 v1(58,25.4) 58,25.29 v1(58.37,24.92) 58.65,25.2 58.65,25.6 v1(58.37,25.87)
  BOTTOM w0.4: R31.1 v1(71.2,27.4)
  BOTTOM w0.5: LD1.1 80.09,26.82 80.07,26.8 R32.1 76.71,26.8 76.61,26.7 v1(76.2,26.7) R29.1
P5V0: length 161.9
  TOP w0.127: 51.2,9.5 R20.2
  TOP w0.25: U6.A1 50.13,12.17 50.13,12.67 50.3,12.85 C7.2 ; C12.2 50.4,6.75 50.2,6.55 50.2,6 U8.A1 ; C4.2 50.3,19.65 50.1,19.45 50.1,18.7 U2.A1
  TOP w0.28: J4.6 25.2,5.71 25.11,5.62 v1(25.11,4.99)
  TOP w0.4: R27.2 51.7,3.7 v1(52.1,3.7) ; R20.2 v1(52.2,9.5) ; R1.2 v1(6.7,26.17) ; v1(49.47,19.6) v1(49.47,20.3) C4.2 ; v1(52.2,16) 52.2,16.05 51.75,16.5 R17.2 ; C12.2 v1(49.47,7.4) v1(49.47,6.6) ; R9.2 v1(2.9,23.17) ; v1(49.5,13.1) v1(49.5,13.8) 50,13.8 C7.2
  SIG1 w0.4: v1(49.47,7.4) v1(49.47,6.6) 49.47,5.03 50,4.5 51.3,4.5 v1(52.1,3.7)
  VCC w0.127: v1(47.4,27.4) 47.39,27.39
  VCC w0.3: 48.8,13.5 49.2,13.5 v1(49.5,13.8) ; 48.8,13.5 48.87,13.57 48.87,17.13 ; 48.8,13.5 48.8,12.7 ; 48.8,12.7 49.1,12.7 v1(49.5,13.1) ; 48.8,12.7 48.8,11.4 ; 48.87,17.13 48.9,17.1 49.9,17.1 51,16 v1(52.2,16) ; 48.87,17.13 48.8,17.2 48.8,17.9 49.4,18.5 49.4,19.14 49.47,19.21 v1(49.47,19.6) v1(49.47,20.3) 47.9,20.3 46.5,21.7 46.5,26.31 46.62,26.43 v1(46.62,26.9) ; v1(49.47,6.6) v1(49.47,7.4) 48.6,8.27 48.6,11.2 48.8,11.4 ; 6.9,7 8.8,8.9 8.8,9.73 v1(9.17,10.1) ; v1(52.2,9.5) 52.2,10.1 51.7,10.6 50.4,10.6 49.7,11.3 48.9,11.3 48.8,11.4 ; v1(46.62,26.9) 47.18,26.9 v1(47.2,26.93) 47.2,27.2 47.39,27.39 v1(46.81,27.39) 46.81,27.09 v1(46.62,26.9)
  VCC w0.4: v1(34.97,9.9) 34.97,8.67 32,5.7 26.6,5.7 25.89,4.99 v1(25.11,4.99) 24.82,4.7 24.82,4.48 v1(24.54,4.21) ; v1(34.97,9.9) 34.97,10.27 v1(35.3,10.6) ; v1(34.97,9.9) 35.8,9.9 36.1,10.2 v1(36.1,10.6) v1(35.3,10.6) ; v1(5.2,19.5) 5.2,14.2 6.1,13.3 6.1,7.8 6.9,7 6.9,5.2 9.6,2.5 17.1,2.5 18.1,3.5 18.1,4.4 18.9,5.2 22.7,5.2 23.69,4.21 v1(24.54,4.21) ; v1(5.2,19.5) v1(5.2,20.8) ; v1(5.2,19.5) 6.47,19.5 v1(7,20.03) v1(7,21.3) ; v1(5.2,19.5) 4.6,20.1 v1(3.5,20.1) v1(3.5,21.4) ; v1(6.7,26.17) 6.2,25.67 6.2,23.2 7,22.4 v1(7,21.3) ; v1(3.5,21.4) 4.6,21.4 v1(5.2,22) v1(5.2,20.8) ; v1(3.5,21.4) 3.5,22.57 v1(2.9,23.17) ; v1(5.2,20.8) 6.5,20.8 v1(7,21.3) ; v1(35.3,10.6) 34.8,11.1 34.8,13.3 36.4,14.9 43,14.9 43.5,15.4 45.5,15.4 46.5,14.4 48.87,14.4 ; v1(24.54,4.21) 24.56,4.19 v1(24.56,3.64) 24.55,3.64 v1(24.55,3.05)
  BOTTOM w0.3: v1(49.47,7.4) v1(49.47,6.6)
  BOTTOM w0.4: 35.7,10.2 R97.1 v1(34.97,9.9) ; 35.7,10.2 v1(35.3,10.6) ; 35.7,10.2 v1(36.1,10.6) ; C47.1 v1(49.5,13.8) ; v1(49.47,19.6) v1(49.47,20.3) C27.1 ; v1(49.47,7.4) C12.2 ; R93.2 v1(9.17,10.1)
VCCIO_0: length 4.7
  TOP w0.24: U4.33 v1(68.26,19.65)
  BOTTOM w0.4: v1(68.26,19.65) 68.01,19.9 C25.1 C26.1 65.31,19.9 65.3,19.91 FB1.1
VCCIO_2: length 5.5
  TOP w0.24: 66.75,11.2 v1(65.8,11.2)
  BOTTOM w0.4: 65.8,12.5 66.1,12.8 FB4.1 ; 65.8,12.5 65.8,11.59 65.8,11.59 v1(65.8,11.2) ; 65.8,12.5 C51.1 64.6,12.99 64.7,13.09 C45.1
1ST_EN: length 14.7
  TOP w0.16: v1(15.9,9.5) 17,9.5 17.8,8.7 25.15,8.7 25.4,8.45 26.25,8.45 26.7,8 J4.3
  BOTTOM w0.6: R95.2 v1(15.9,9.5) U20.4
CHG_FULL: length 20.7
  SIG1 w0.22: v1(10.6,15) 15.65,15 16.56,14.09 19.21,14.09 19.9,13.4 v1(19.9,12.1)
  BOTTOM w0.25: TP16.1 14.71,14.8 14.51,15 v1(10.6,15) 10.1,15 9.7,15.4 U17.1 ; U18.C2 19.2,12.9 19.3,12.8 R82.1
  BOTTOM w0.4: R79.2 20.11,12 20.01,12.1 v1(19.9,12.1) R82.1
DONE2_LED: length 2.6
  TOP w0.15: 69.75,11.2 v1(69.75,10.37)
  BOTTOM w0.2: R86.2 70.8,11 70.17,10.37 v1(69.75,10.37)
DPU_UART_RX: length 39.3
  SIG1 w0.2: v1(74.3,23) 74.3,22.2 73.1,21 73.1,18.8 69.61,15.3 69.61,12.45 67.9,10.74 67.9,10.36 68.57,9.69 68.57,9.05 67.8,8.27 67.8,6.85 67.6,6.65 66.65,6.65 65.85,7.45 64.7,7.45 63.8,8.35 60.52,8.35 v1(60.07,7.9)
  BOTTOM w0.3: v1(60.07,7.9) R101.2 ; J2.24 81.25,22 81,22.25 78.6,22.25 77.7,21.35 74.75,21.35 74.3,21.8 v1(74.3,23)
DPU_UART_TX: length 36.2
  TOP w0.2: R15.1 v1(59.7,20.2)
  SIG1 w0.2: v1(83,20.73) 76.9,20.73 75.7,21.93 75.7,23.1 75,23.8 74.05,23.8 72.15,21.9 72.15,19.1 68.7,15.65 67.25,15.65 66.05,14.45 62.3,14.45 59.4,17.35 59.4,18.85 59.7,19.15 v1(59.7,20.2)
FF2_SCK: length 16.1
  TOP w0.15: U5.6 77.11,12.84 76.78,13.16 76.78,13.31 76.51,13.58 75.32,13.58 74.99,13.25 v1(74.15,13.25) U4.15
  TOP w0.25: v1(81.29,10.77) 81.73,10.77 81.74,10.77 J1.3
  VCC w0.22: v1(81.29,10.77) 80.53,10.77 78.05,13.25 v1(74.15,13.25)
  BOTTOM w0.2: R77.1 73.6,13.8 v1(74.15,13.25)
FF2_SS: length 21.3
  TOP w0.15: v1(79.27,14.25) 78.49,14.25 77.86,13.62 77.18,13.62 76.71,14.09 75.14,14.09 74.8,13.75 U4.16
  TOP w0.16: J1.2 83.83,11.27 84.14,11.58 84.14,12.51 83.12,13.53 TP7.1 81.83,13.53 81.11,14.25 v1(79.27,14.25)
  TOP w0.2: v1(79.64,16.61) 79.65,16.61 U5.1
  SIG1 w0.2: v1(79.27,14.25) 79.27,16.23 v1(79.64,16.61)
  BOTTOM w0.25: v1(79.64,16.61) 79.64,17.55 79.5,17.7 R51.1
FL2_MISO: length 3.3
  TOP w0.25: U5.2 v1(78.38,16.61)
  BOTTOM w0.25: v1(78.38,16.61) 78.39,16.6 R69.1
  BOTTOM w0.4: R69.1 77.81,15.82 77.69,15.71 R66.1
FL2_MOSI: length 6.7
  TOP w0.3: v1(75.14,11.75) 75.71,11.75 75.84,11.88 U5.5
  BOTTOM w0.22: 76.03,12.55 76.03,11.98 75.81,11.75 v1(75.14,11.75) ; 76.03,12.55 78.2,12.55 78.49,12.83 R76.2 ; 76.03,12.55 R74.2
FL2_RST: length 4.5
  TOP w0.13: v1(80.51,13.75) 80.12,13.75 80.08,13.7 78.76,13.7 78.38,13.32 U5.7
  BOTTOM w0.2: v1(80.51,13.75) R68.1
FL2_WP: length 6.9
  TOP w0.22: U5.3 v1(77.11,16.61)
  BOTTOM w0.25: R45.1 79,21 78.5,20.5 78.5,18 v1(77.11,16.61)
FP2_RST: length 30.6
  TOP w0.15: C8.2 75.28,10.55 75.03,10.8 73.52,10.8 v1(73.38,10.66) 73,10.28 73,9.3 72.8,9.1 70.15,9.1 70,9.25 70,9.7 70.25,9.95 70.25,11.2
  TOP w0.2: J1.6 81.26,9.27 81.25,9.28 v1(81.1,9.28)
  TOP w0.36: C8.2 76.12,9.96 76.13,9.97 R18.2
  VCC w0.22: v1(81.1,9.28) 80.07,9.28 77.75,11.6 76.5,11.6 75.56,10.66 v1(73.38,10.66)
  BOTTOM w0.13: v1(73.38,10.66) 73.83,11.11 73.83,11.83 74.35,12.35 74.35,12.68 74.71,13.03 74.71,14.86 75.1,15.25 75.1,16.66 76.1,17.66 SW1.1
FP2_SI: length 14.3
  TOP w0.15: U4.17 v1(74.15,14.25)
  TOP w0.2: v1(80.9,11.4) 80.9,12 81.03,12.13 TP8.1
  TOP w0.25: J1.1 81.27,11.77 v1(80.9,11.4)
  VCC w0.22: v1(74.15,14.25) 77.09,14.25 77.1,14.26 v1(77.49,14.26) 78.04,14.26 v1(80.9,11.4)
  BOTTOM w0.22: R76.1 v1(77.49,14.26) 77.49,14.66 77.65,14.82 R69.2
FP2_SO: length 14.8
  TOP w0.15: v1(74.97,12.52) 74.42,12.52 74.19,12.75 U4.14
  TOP w0.2: v1(80.9,10.05) 81.61,10.05 81.9,9.77 J1.5
  VCC w0.22: v1(80.9,10.05) 80.2,10.05 77.73,12.52 v1(74.97,12.52)
  BOTTOM w0.13: R74.1 75.39,14.36 75.22,14.19 75.22,12.73 75.01,12.52 v1(74.97,12.52)
  BOTTOM w0.4: R66.2 76.11,15.12 76.05,15.06 76.05,14.37 R74.1
IAM_ALIVE: length 36.9
  TOP w0.15: v1(70.75,9.7) 70.75,11.2
  SIG1 w0.2: v1(70.75,9.7) 70.5,9.95 70.5,10.8 72.8,13.1 72.8,14.75 73.35,15.3 75.3,15.3 75.7,14.9 75.7,14.2 76.45,13.45 79.34,13.45 80.39,14.5 81.35,14.5 82.1,13.75 86.75,13.75 87.4,13.1 87.4,11.65 86.95,11.2 86.05,11.2 84.65,9.8 84.65,5.9 83.65,4.9 v1(82.2,4.9)
  BOTTOM w0.4: R119.2 v1(82.2,4.9)
IAM_ALIVE_EXT: length 7.8
  SIG1 w0.2: v1(84.33,4.4) 85.5,5.57 85.5,9.6 v1(86.5,10.6)
  BOTTOM w0.4: R118.2 v1(84.33,4.4)
IO1: length 10
  TOP w0.127: v1(82.98,14.37) 82.06,14.37 81.71,14.71 76.95,14.71 76.76,14.52 74.71,14.52 74.48,14.75 U4.18
IO2: length 11.8
  TOP w0.15: U4.13 74.01,12.25 74.55,11.72 v1(74.55,11.32)
  BOTTOM w0.2: v1(74.55,11.32) 74.55,10.93 74.82,10.66 77.56,10.66 80.01,13.11 J2.17
IO3: length 16.6
  TOP w0.15: 72.25,11.2 v1(72.25,10.37)
  SIG1 w0.2: v1(86.5,13.11) 80.11,13.11 79.25,12.25 77.15,12.25 74.8,9.9 72.92,9.9 72.45,10.37 v1(72.25,10.37)
IO4: length 14
  TOP w0.15: v1(72,9.6) 71.75,9.85 71.75,11.2
  BOTTOM w0.2: v1(72,9.6) 72.45,9.6 72.65,9.8 73.95,9.8 74.15,10 77.98,10 80.23,12.25 81.05,12.25 81.46,11.84 J2.16
IO5: length 22.3
  TOP w0.15: U4.34 67.76,21.16 68.9,22.3 82.85,22.3 83.65,23.1 TP18.1 v1(86.5,22)
IO6: length 20.7
  TOP w0.15: v1(86.5,20.7) 86.1,20.7 85.82,20.98 85.82,20.98 TP19.1 69.5,21.8 68.76,21.06 U4.32
IO7: length 14.4
  TOP w0.127: U4.19 74.54,15.25 74.72,15.07 74.73,15.07 74.85,14.95 76.53,14.95 76.65,15.07 86.63,15.07 v1(87.3,14.4)
IO_P5V0_SHDN: length 6.5
  TOP w0.15: 71.25,11.2 v1(71.25,10.37)
  BOTTOM w0.2: R99.1 74.91,8.6 74.71,8.4 73.9,8.4 73.5,8.8 TP17.1 71.8,8.8 71.37,9.23 71.37,9.86 71.25,9.98 v1(71.25,10.37)
IO_P5V0_SHDN_EXT: length 10.2
  SIG1 w0.2: v1(78.53,7.5) 79.18,8.15 82.75,8.15 83.35,8.75 83.35,10.1 83.82,10.57 v1(84.43,10.57)
  BOTTOM w0.3: v1(78.53,7.5) 78.2,7.5 77.9,7.8 R100.1 ; J2.15 v1(84.43,10.57)
LD_PWR_EN: length 3.3
  TOP w0.2: R22.2 66.2,8.8 67.75,10.35 67.75,11.2
LD_PWR_EN_EXT: length 20.7
  TOP w0.2: R23.2 v1(71.1,8.5)
  SIG1 w0.2: v1(86.5,11.84) 85.99,12.35 80.4,12.35 79.35,11.3 78,11.3 75.2,8.5 v1(71.1,8.5)
LDO22-1: length 37.4
  TOP w0.4: v1(10.6,4.1) 10.3,3.8 C15.1
  VCC w0.4: v1(15.9,7.6) 15.2,7.6 14.2,8.6 13,8.6 12,7.6 11.2,7.6 10.42,8.38 10.38,8.38 ; 10.38,8.38 10.38,12.02 v1(9.7,12.7) 9.36,13.04 9.36,15.56 10.5,16.7 10.5,19.3 10.2,19.6 10.2,21.18 10.6,21.58 v1(12.39,21.58) 12.4,21.58 v1(13.05,21.58) 13.06,21.57 v1(13.68,21.57) ; 10.38,8.38 9.8,7.8 9.8,6 10.6,5.2 v1(10.6,4.1)
  BOTTOM w0.3: U17.5 v1(9.7,12.7) 10.5,12.7 10.7,12.5 C55.1
  BOTTOM w0.4: U22.5 v1(10.6,4.1)
  BOTTOM w0.5: C64.1 16.5,6.71 16.7,6.91 C59.1 16.6,7.6 v1(15.9,7.6) U20.5
LDO22-2: length 78.1
  TOP w0.4: C1.1 v1(41.4,26.7) ; v1(32.11,16.39) 32.11,17.74 31.45,18.4 31.45,22.1 29.35,24.2 R128.2
  VCC w0.2: v1(47.3,17) 46.5,17.8 46.2,17.8 45,19 44.8,19
  VCC w0.4: 31.5,17.9 31.5,19.3 33.8,21.6 38.7,21.6 41.1,24 43.8,24 ; 31.5,17.9 31,17.4 26.6,17.4 26.4,17.2 23.1,17.2 21.2,15.3 21.2,13.9 ; 31.5,17.9 32.11,17.29 v1(32.11,16.39) 32.11,15.81 v1(32.14,15.78) ; v1(18.3,11.37) 18.87,10.8 20.8,10.8 21.2,11.2 21.2,13.9 ; v1(41.4,26.7) 42.9,26.7 43.8,25.8 43.8,24 ; 21.2,13.9 19.9,13.9 19.1,14.7 18.09,14.7 v1(17.49,15.3) ; 43.8,24 43.8,23.6 44.8,22.6 44.8,19 42.8,17 v1(42.8,16.38)
  BOTTOM w0.25: C38.2 42.8,17 43.3,17 43.79,17.49 U16.B1 ; C43.2 18.3,14.7 18.7,14.3 U18.B1
  BOTTOM w0.3: R67.1 42.7,16.19 42.8,16.29 v1(42.8,16.38) C38.2 ; v1(41.4,26.7) 42.07,26.7 42.2,26.57 42.2,26.3 42.1,26.2 U13.8
  BOTTOM w0.4: R71.1 v1(17.49,15.3) 17.59,15.2 C43.2 ; R82.2 v1(18.3,11.37) ; R60.2 v1(47.3,17)
LED0: length 81.2
  TOP w0.15: U4.39 v1(64.36,16.75)
  TOP w0.2: v1(23.6,5.65) 23.8,5.65 24.2,6.05 J4.8
  TOP w0.4: v1(66.5,22.07) R12.2 R8.1
  SIG1 w0.16: v1(66.5,22.07) 66.5,24.75 66.05,25.2 63.95,25.2 63.02,26.13 60.72,26.13 59.9,26.95 48.4,26.95 46.2,24.75 45.05,24.75 44.45,24.15 44.45,20.15 43.75,19.45 43.75,15.75 41.3,13.3 41.3,12.55 37.95,9.2 34.2,9.2 33.6,9.8 33.6,11.15 32.98,11.77 26.68,11.77 26,12.45 24.25,12.45 22.45,10.65 22.45,6.8 v1(23.6,5.65)
  SIG1 w0.2: v1(64.36,16.75) 64.36,17.17 64.59,17.4 66.9,17.4 67.25,17.75 67.25,20.35 66.5,21.1 v1(66.5,22.07)
LED1: length 76.6
  TOP w0.15: U4.40 v1(64.87,16.25)
  TOP w0.2: v1(24.2,5.15) 24.4,5.35 24.4,5.5 24.7,5.8 J4.7
  TOP w0.4: R7.1 R14.2 v1(63.2,21.97)
  SIG1 w0.16: v1(63.2,21.97) 63.2,24.55 62.45,25.3 60.25,25.3 59.05,26.5 57,26.5 56.15,25.65 49.75,25.65 48.3,24.2 47.45,24.2 45.65,22.4 45.65,20.05 44.5,18.9 44.5,15.25 42.35,13.1 42.35,12 40.35,10 40.35,9.2 39.7,8.55 28.8,8.55 28.15,9.2 28.15,10.05 27.75,10.45 24.9,10.45 24.2,9.75 v1(24.2,5.15)
  SIG1 w0.2: v1(63.2,21.97) 64.22,20.95 65.25,20.95 66.45,19.75 66.45,18.3 66.15,18 63.8,18 63.6,17.8 63.6,16.5 63.85,16.25 v1(64.87,16.25)
LED2: length 24.3
  TOP w0.15: U4.41 v1(64.36,15.75)
  TOP w0.4: v1(60.5,21.6) 60.31,21.6 59.9,22.01 R13.2 R6.1
  SIG1 w0.2: v1(64.36,15.75) 63.45,15.75 62.8,16.4 62.8,19.9 61.1,21.6 v1(60.5,21.6)
  BOTTOM w0.2: v1(64.36,15.75) 60.5,15.75 59.55,14.8 58.75,14.8 57.5,13.55 57.5,11.17 58.6,10.07 R91.2
LOCK_EN: length 22.4
  TOP w0.16: v1(11.47,8.55) 16.85,8.55 17.2,8.2 24.85,8.2 25.05,8 25.95,8 26.2,7.75 J4.4
  SIG1 w0.2: v1(11.47,8.55) 11.47,12.36 11.6,12.48 v1(11.6,12.87)
  BOTTOM w0.25: U17.4 v1(11.6,12.87)
  BOTTOM w0.3: U20.2 v1(11.47,8.55)
P5033: length 61
  VCC w0.4: v1(82.3,6.3) v1(82.3,7.1) v1(83,7.1) ; v1(82.3,6.3) v1(83,6.3) ; v1(82.3,6.3) 80.7,4.7 76.4,4.7 75.4,5.7 71.75,5.7 71.2,5.15 71.2,3.2 70.4,2.4 68,2.4 67.2,3.2 62.3,3.2 61.1,4.4 55.7,4.4 53.4,6.7 51.2,6.7 47.95,3.45 46.35,3.45 45.6,4.2 45.6,13 ; v1(83,6.3) v1(83.77,6.3) v1(83.77,7.1) v1(83,7.1) ; v1(83,6.3) v1(83,7.1) ; 45.6,13 45.5,13 44.93,13.57 v1(44.93,14.1) 45.43,14.1 v1(45.6,13.93) 45.6,13
P5033_PRE: length 17.3
  TOP w0.4: v1(44.13,12.71) 45.87,10.97 45.87,8.18 47.4,6.65 v1(47.4,4.63)
  BOTTOM w0.3: L11.2 45,5.5 44.5,5 R113.1
  BOTTOM w0.4: R80.1 42.61,12.71 42.59,12.7 C49.2 ; R80.1 v1(44.13,12.71) ; R80.1 43.4,13.31 43.3,13.41 R73.1
  vias: v1(48.07,5.67) v1(48.07,5)
PSU_UART_RX: length 5.7
  TOP w0.15: 69.25,11.2 v1(69.25,9.59)
  BOTTOM w0.26: R106.2 67.46,6.82 67.81,7.16 67.81,8.26 68.25,8.7 68.9,8.7 69.25,9.05 v1(69.25,9.59)
PSU_UART_TX: length 18.8
  TOP w0.15: v1(67.9,9.5) 68.25,9.85 68.25,11.2
  SIG1 w0.2: v1(58.7,19.3) 58.7,16.9 61.9,13.7 65.4,13.7 66.7,12.4 66.7,9.95 67.15,9.5 v1(67.9,9.5)
  BOTTOM w0.3: R50.1 v1(58.7,19.3)
RAM_ADQ0: length 7.3
  TOP w0.15: U3.D3 60.77,13.57 60.77,12.57 61.32,12.03 63.3,12.03 64.52,13.25 U4.46
